# EAGLE board dna-pcb v29 (EAGLE 9.7.0)
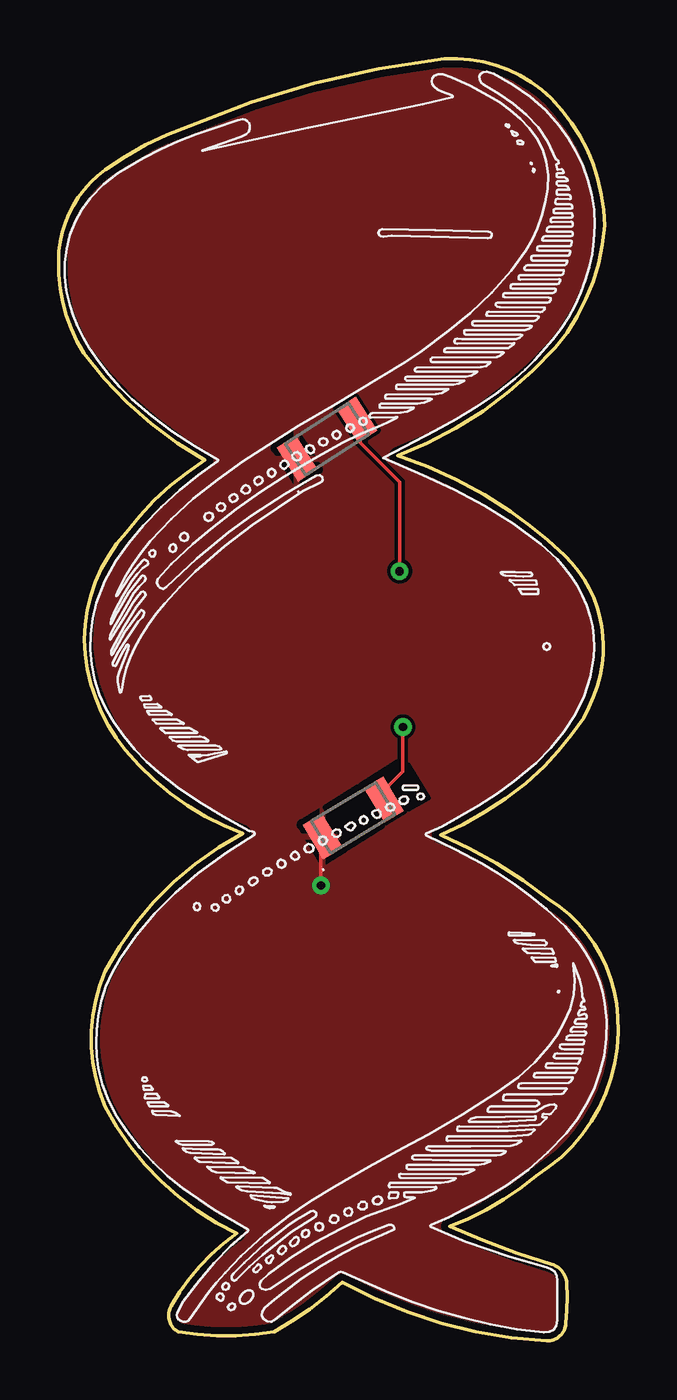
[diagram p0: board, top side]
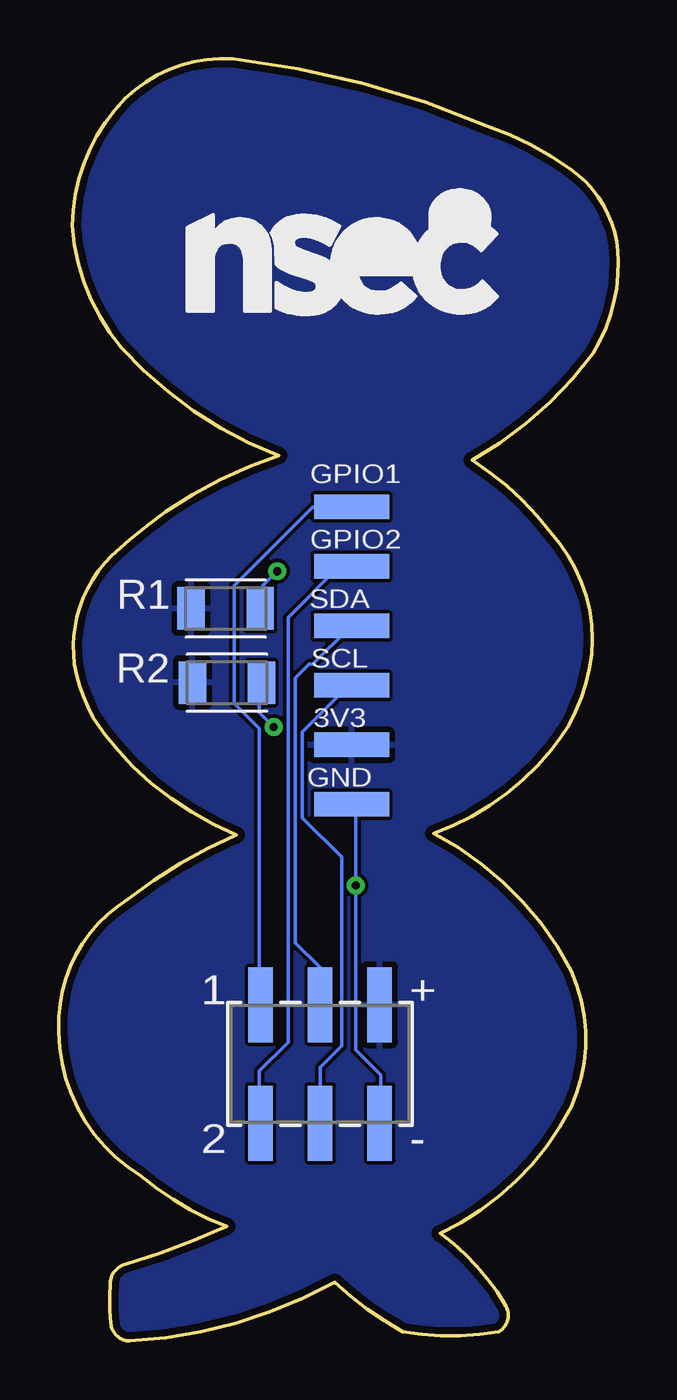
[diagram p1: board, bottom side, seen from below]

Size 23.88 x 54.73 mm. Coordinates in mm from the lower left corner, seen from the top.
Outline: 16.7,4.89 arc19 20.37,7.05 arc63 23.86,13.84 arc56 20.9,18.86 arc16 16.3,21.59 arc20 20.72,24.51 arc9 22.4,26.59 arc19 23.2,28.89 arc20 23.1,30.89 arc33 21.6,33.51 arc9 19.3,35.39 arc16 14.48,37.78 arc27 21.2,42.39 arc36 23.29,47.6 arc44 21.02,53.03 arc48 16.46,54.72 arc17 5.58,51.85 arc16 2,49.99 arc54 0,46.09 arc33 1.07,42.16 arc24 6.23,37.59 arc21 2.89,34.51 arc42 1.1,29.94 arc39 2.85,25.23 arc31 7.87,21.66 arc35 2,15.79 arc48 2,9.99 arc37 7.6,4.59 arc25 4.8,1.49 arc90 5.1,0.39 arc20 9.2,0.39 arc14 12.09,2.5 arc25 20.84,0 arc86 21.65,0.75 arc8 21.68,2.45 arc71 21.04,3.27 arc-8 16.7,4.89
Copper layers (1*16): Top 0.035mm / dielectric 1.5mm / Bottom 0.035mm
Design rules "default *": minimum track width 6mil, minimum drill 0.35mm, track to track 6mil, track to pad 6mil, pad to pad 6mil, via to via 6mil, smd to smd 6mil, copper to edge 0.3mm, drill to drill 6mil, minimum pad ring 10mil, minimum via ring 8mil, stop-mask expansion 4mil, vias tented up to drill 0mil, thermal gap 10mil
tRestrict: area 11.3,21 to 13.8,23.7; area 14.1,24.1 to 14.1,24.1; area 12.9,23.7 to 14.5,24.8; area 14.3,22.7 to 15.8,24.6

## Footprints (pad centres in the part's own frame; a part is rotated, then mirrored left to right if it is on the bottom)
LEDC3216X75N_FLAT-R = smd 0.962 x 1.712: A 1.525,0; C -1.525,0
CONN6_M20-8760342_HRW = smd 1.041 x 3.2: 1 -2.54,2.525; 2 -2.54,-2.525; 3 0,2.525; 4 0,-2.525; 5 2.54,2.525; 6 2.54,-2.525
SAOPADBREAKOUT = smd 1.041 x 3.2: 1 -6.35,0; 2 -3.81,0; 3 -1.27,0; 4 1.27,0; 5 3.81,0; 6 6.35,0
RESC3216X70 = smd 1.165 x 1.815: 1 -1.475,0; 2 1.475,0

## Placement (x,y rotation side)
D1  LED_RED  [LEDC3216X75N_FLAT-R]  11.45,38.49 32.8 top
D2  LED_RED  [LEDC3216X75N_FLAT-R]  12.57,22.33 31.1 top
J1  M20-8760342CONN6_M20-8760342_HRW  [CONN6_M20-8760342_HRW]  12.72,11.82 0 bottom
J2  SAOPADBREAKOUT  [SAOPADBREAKOUT]  11.38,29.25 270 bottom
R1  [RESC3216X70]  16.75,31.26 0 bottom
R2  [RESC3216X70]  16.69,28.1 0 bottom

## Library data of the parts
D1 D2 = led; CATEGORY: LED; COLOR: RED; DESCRIPTION: CHIP LED FLAT; SUB-CATEGORY: CHIP; TYPE: FLAT_TOP
J1 = Library; COPYRIGHT: Copyright (C) 2024 Ultra Librarian. All rights reserved.; MANUFACTURER_PART_NUMBER: M20-8760342; MFR_NAME: Harwin
J2 = Library
R1 R2 = Resistor; CATEGORY: Resistor; SUB-CATEGORY: Fixed

## Nets
3V3: J1.5 J2.5 R1.1 R2.1
GND: D1.C D2.C J1.6 J2.6
GPIO1: J1.1 J2.1
GPIO2: J1.2 J2.2
N$1: D1.A R1.2
N$2: D2.A R2.2
SCL: J1.4 J2.4
SDA: J1.3 J2.3

## Tracks (layer width: path | path; a pad name or v marks a point on that pad's centre or on a via)
3V3
  pour Bottom: -3.71,-5.97 -3.73,-6 -4.88,-7.15 25.34,-7.15 25.34,62.54 -3.71,62.54
GND  (via drill 0.35)
  Top 0.152: v11.2,19.44 11.2,21.42 D2.C
  Bottom 0.152: J1.6 10.13,9.38 10.13,11.36 11.2,12.43 v11.2,19.44 11.2,22.64 11.35,22.79 J2.6
  pour Top: -2.44,-4.61 22.85,-4.61 28.35,0.89 28.35,60 -2.44,60
GPIO1
  Bottom 0.152: J1.1 15.31,14.41 15.31,26.15 16.38,27.21 16.38,32.24 13.02,35.6 11.5,35.6 J2.1
GPIO2
  Bottom 0.152: J1.2 15.31,9.38 15.31,11.52 14.09,12.74 14.09,30.88 11.96,33.01 11.5,33.01 J2.2
N$1  (via drill 0.35)
  Top 0.152: v14.55,32.85 14.55,36.66 12.87,38.34 12.87,39.1 D1.A
  Bottom 0.152: v14.55,32.85 15.16,32.24 15.16,31.33 R1.2
N$2  (via drill 0.35)
  Top 0.152: v14.69,26.2 14.69,24.31 13.94,23.56 13.94,23.25 D2.A
  Bottom 0.152: v14.69,26.2 15.31,26.82 15.31,27.98 R2.2
SCL
  Bottom 0.152: J1.4 12.72,11.67 11.81,12.58 11.81,20.66 13.48,22.33 13.48,26 11.5,27.98 J2.4
SDA
  Bottom 0.152: J1.3 12.72,15.94 13.78,17 13.78,28.29 13.18,28.89 13.02,28.89 11.5,30.41 J2.3

## Text on the board
bStop: dna